# Altium PCB CONN-SMD_1.25-4PWT.pcbdoc
Units mm, origin at the board's own origin, x right, y up, seen from the top; angles counter-clockwise.
Board outline 23.65 x 18.5 mm, 2 copper layers (Top Layer, Bottom Layer); 1 components, 0 nets, 6 pads, 0 vias.
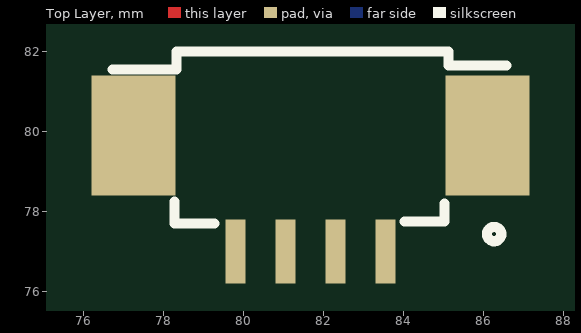
[diagram p0: Top Layer view]
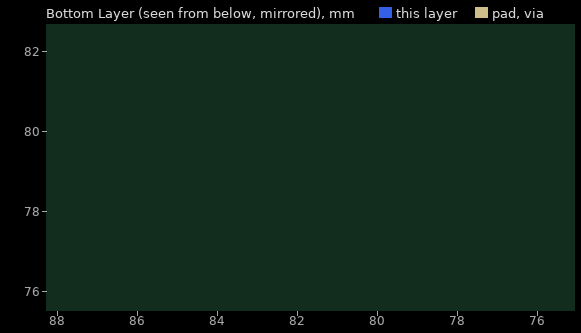
[diagram p1: Bottom Layer view, seen from below]

## Layer stack, top to bottom
Top Layer: signal copper (thickness not stored)
Dielectric: dielectric 0.32, FR-4, Dk 4.8
Bottom Layer: signal copper (thickness not stored)

## Board outline
93.5,69.85 69.85,69.85 69.85,88.35 93.5,88.35

## Components (designator, comment, footprint, x,y, rotation, side; value= is the part's Value field where it differs from the comment)
? "CONN-SMD_1.25-4PWT" CONN-SMD_1.25-4PWT 81.675,78.45 r0 top

## Footprints (in the part's own frame and the unit in brackets; to place one, negate y for a bottom-side part, rotate by r counter-clockwise, add the part's x,y. Pads: shape width x height; smd on the part's side, far side on the other; paste and mask are expansions set on the pad)
CONN-SMD_1.25-4PWT [mm]
  rect 0.5x1.6 smd: 1(1.875,-1.45) 2(0.625,-1.45) 3(-0.625,-1.45) 4(-1.875,-1.45)
  rect 2.1x3 smd: 5(4.425,1.45) 6(-4.425,1.45)
  silkscreen extent -4.95,-1.2 4.9,3.55

## Nets (pads, with @x,y where several pads share a name; then routed paths per layer and width w, separated by ;. In a path a pad name is that pad's centre, name@x,y a point inside that pad or via, vN(x,y) a via of type N, cw(c..) or ccw(c..) an arc to the next point about the centre after c; other vN are vias at no path point)
pads on no net: ?.1 ?.2 ?.3 ?.4 ?.5 ?.6